# EAGLE board parallelEMtest (EAGLE 9.5.0)
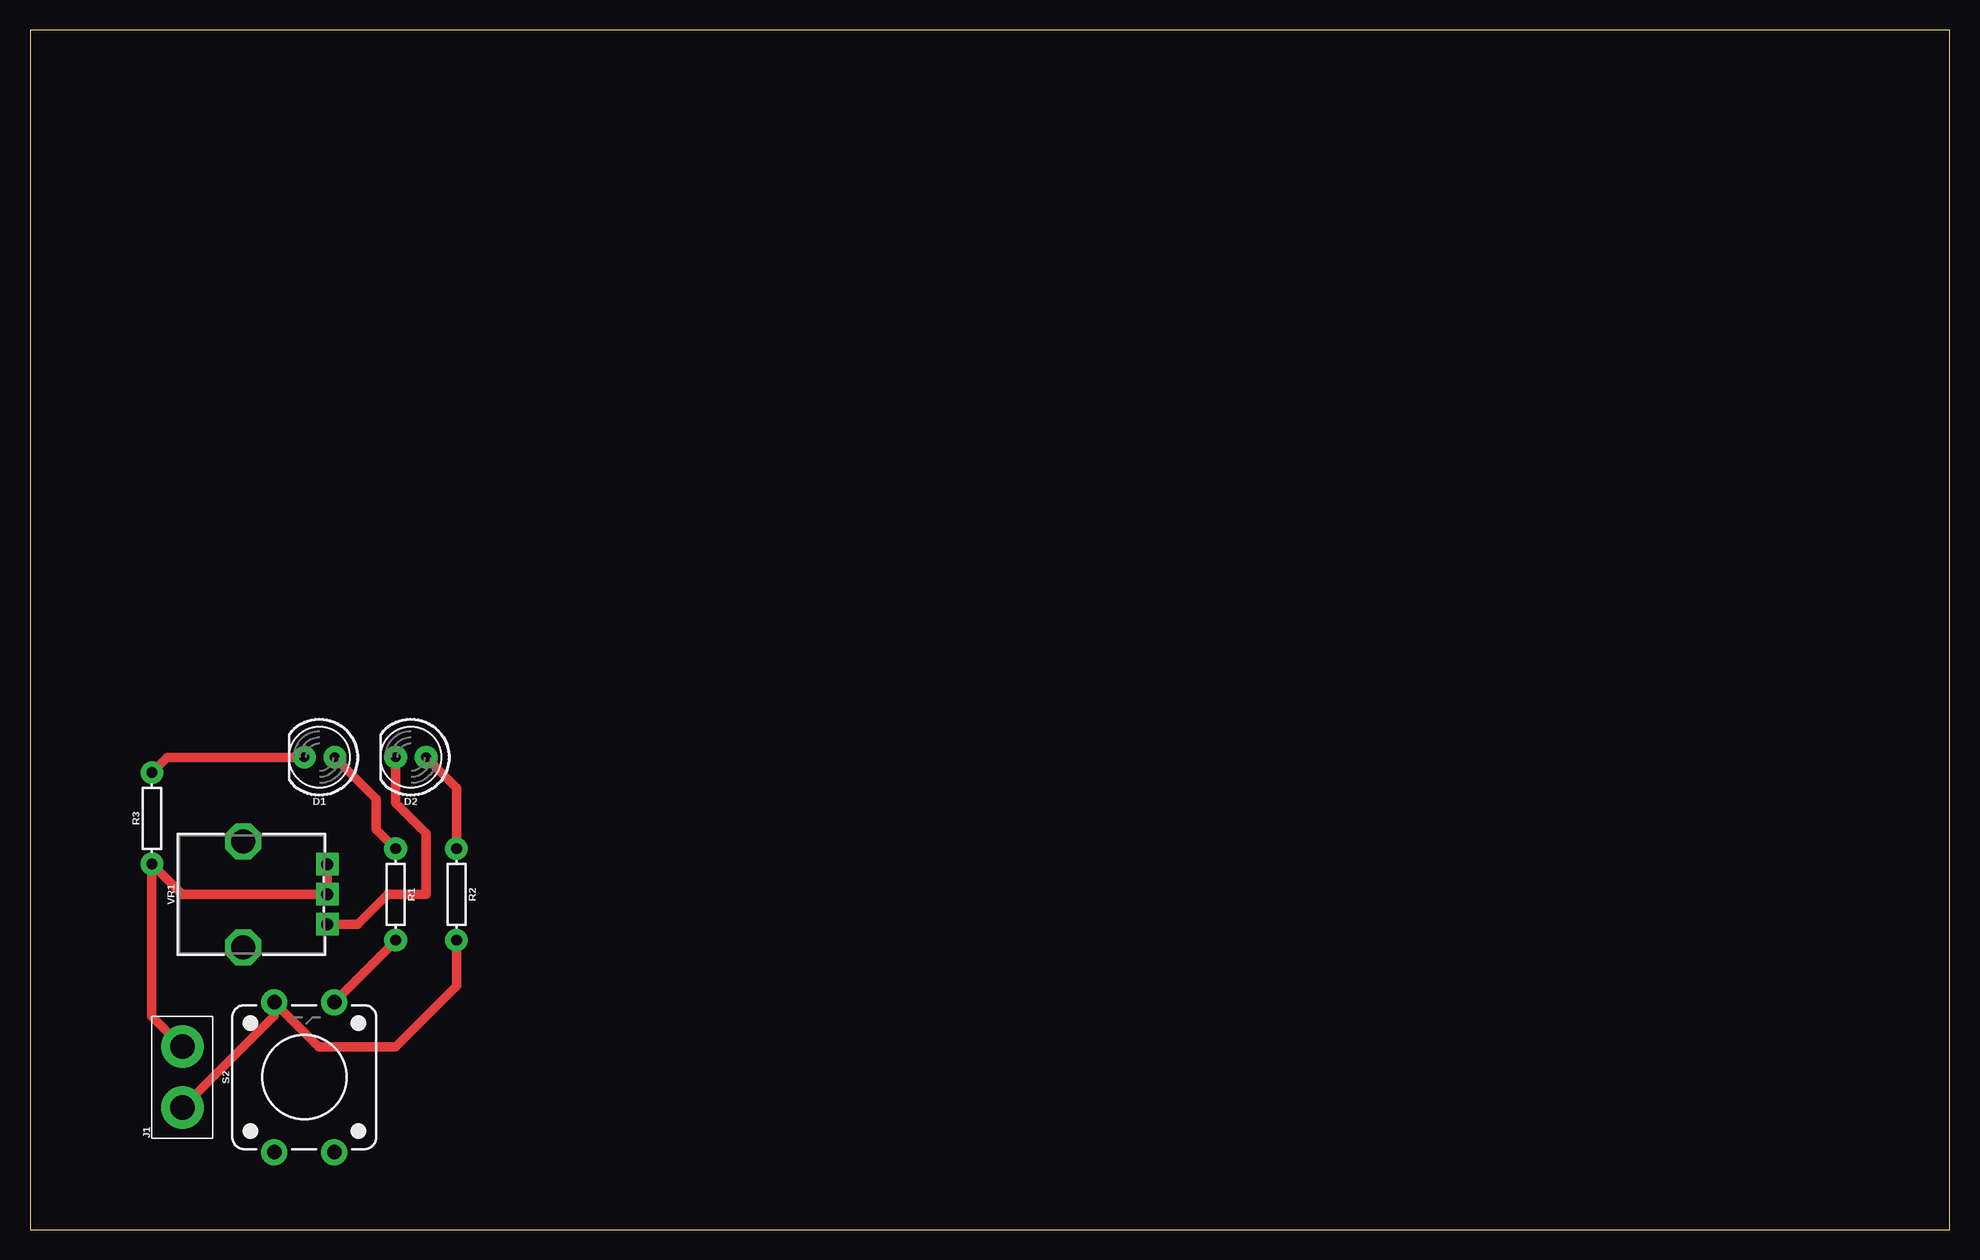
[diagram p0: board, top side]
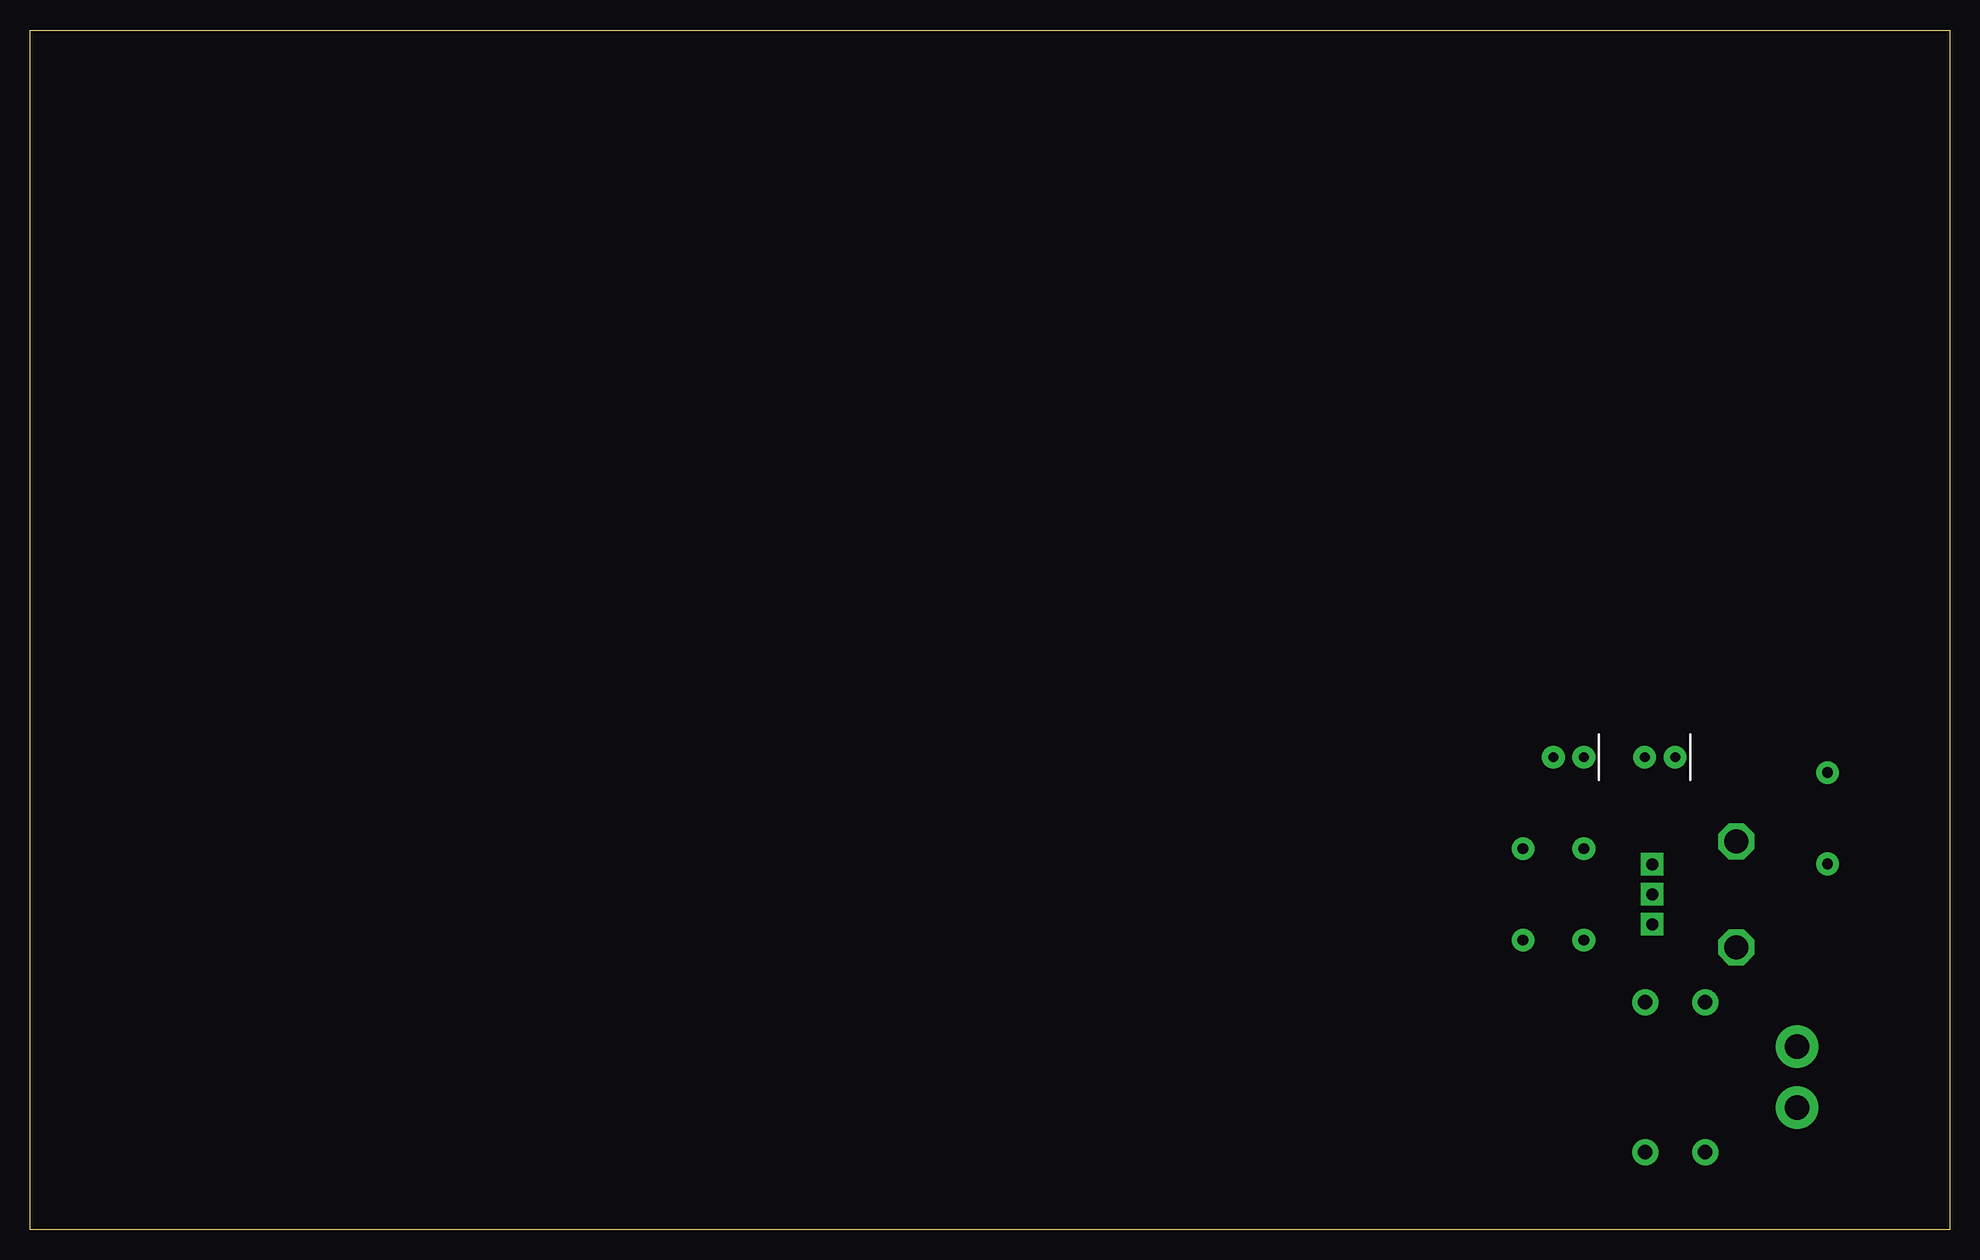
[diagram p1: board, bottom side, seen from below]

Size 160 x 100 mm. Coordinates in mm from the lower left corner, seen from the top.
Outline: 0,0 160,0 160,100 0,100 0,0
Copper layers (1*16): Top 0.035mm / dielectric 1.5mm / Bottom 0.035mm
Design rules "default *": minimum track width 35mil, minimum drill 0.35mm, track to track 6mil, track to pad 6mil, pad to pad 6mil, via to via 6mil, smd to smd 6mil, copper to edge 40mil, drill to drill 6mil, minimum pad ring 10mil, minimum via ring 8mil, stop-mask expansion 4mil, vias tented up to drill 0mil, thermal gap 10mil

## Footprints (pad centres in the part's own frame; a part is rotated, then mirrored left to right if it is on the bottom)
LED_5MM = drill 0.813 pad 1.88: A -1.27,0; K 1.27,0
1X02_XTRA_BIG = drill 2.057 pad 3.556: 1 -2.54,0; 2 2.54,0
AXIAL-0.3 = drill 0.9 pad 1.88: P$1 -3.81,0; P$2 3.81,0
TACTILE_SWITCH_PTH_12MM = drill 1.2 pad 2.159: 1 6.25,-2.5; 2 -6.25,-2.5; 3 6.25,2.5; 4 -6.25,2.5
POT-PTH-ALPS = drill 1 pad 1.88 square: P$1 7,-2.5; P$2 7,0; P$3 7,2.5 | drill 2 octagon: P$4 0,-4.4; P$5 0,4.4

## Placement (x,y rotation side)
D1  [LED_5MM]  24.13,39.37 180 top
D2  [LED_5MM]  31.75,39.37 180 top
J1  [1X02_XTRA_BIG]  12.7,12.7 90 top
R1  270  [AXIAL-0.3]  30.48,27.94 270 top
R2  ?  [AXIAL-0.3]  35.56,27.94 270 top
R3  240  [AXIAL-0.3]  10.16,34.29 90 top
S2  SPST12mm  [TACTILE_SWITCH_PTH_12MM]  22.86,12.7 90 top
VR1  100  [POT-PTH-ALPS]  17.78,27.94 0 top

## Library data of the parts
D1 D2 = SparkFun-LED
J1 = SparkFun-Connectors
R1-R3 = SparkFun-Resistors
S2 = SparkFun-Switches; PROD_ID: SWCH-09185; SF_SKU: COM-09190
VR1 = SparkFun-Resistors; PROD_ID: RES-09177; SF_SKU: COM-09288

## Nets
3.3V: J1.2 R3.P$1 VR1.P$2 VR1.P$3
12V: J1.1 R2.P$2 S2.3
N$1: R1.P$2 S2.1
N$2: D1.A R1.P$1
N$3: D2.A R2.P$1
N$4: D1.K R3.P$2
N$5: D2.K VR1.P$1

## Tracks (layer width: path | path; a pad name or v marks a point on that pad's centre or on a via)
3.3V
  Top 0.787: J1.2 10.16,17.78 R3.P$1 12.7,27.94 VR1.P$2 VR1.P$3
12V
  Top 0.787: J1.1 20.36,17.82 S2.3 24.07,15.24 30.48,15.24 35.56,20.32 R2.P$2
N$1
  Top 0.787: S2.1 30.48,24.07 R1.P$2
N$2
  Top 0.787: R1.P$1 28.86,33.37 28.86,35.91 D1.A
N$3
  Top 0.787: D2.A 35.56,36.83 R2.P$1
N$4
  Top 0.787: R3.P$2 11.43,39.37 D1.K
N$5
  Top 0.787: D2.K 30.48,35.56 33.02,33.02 33.02,27.94 29.82,27.94 27.32,25.44 VR1.P$1